# Altium PCB Copy of ESP32.PcbDoc
Units mm, origin at the board's own origin, x right, y up, seen from the top; angles counter-clockwise.
Board outline 68.47 x 29.07 mm, 2 copper layers (Top Layer, Bottom Layer); 62 components, 74 nets, 294 pads, 12 vias.
Unrouted connection lines stored in the file: 75.
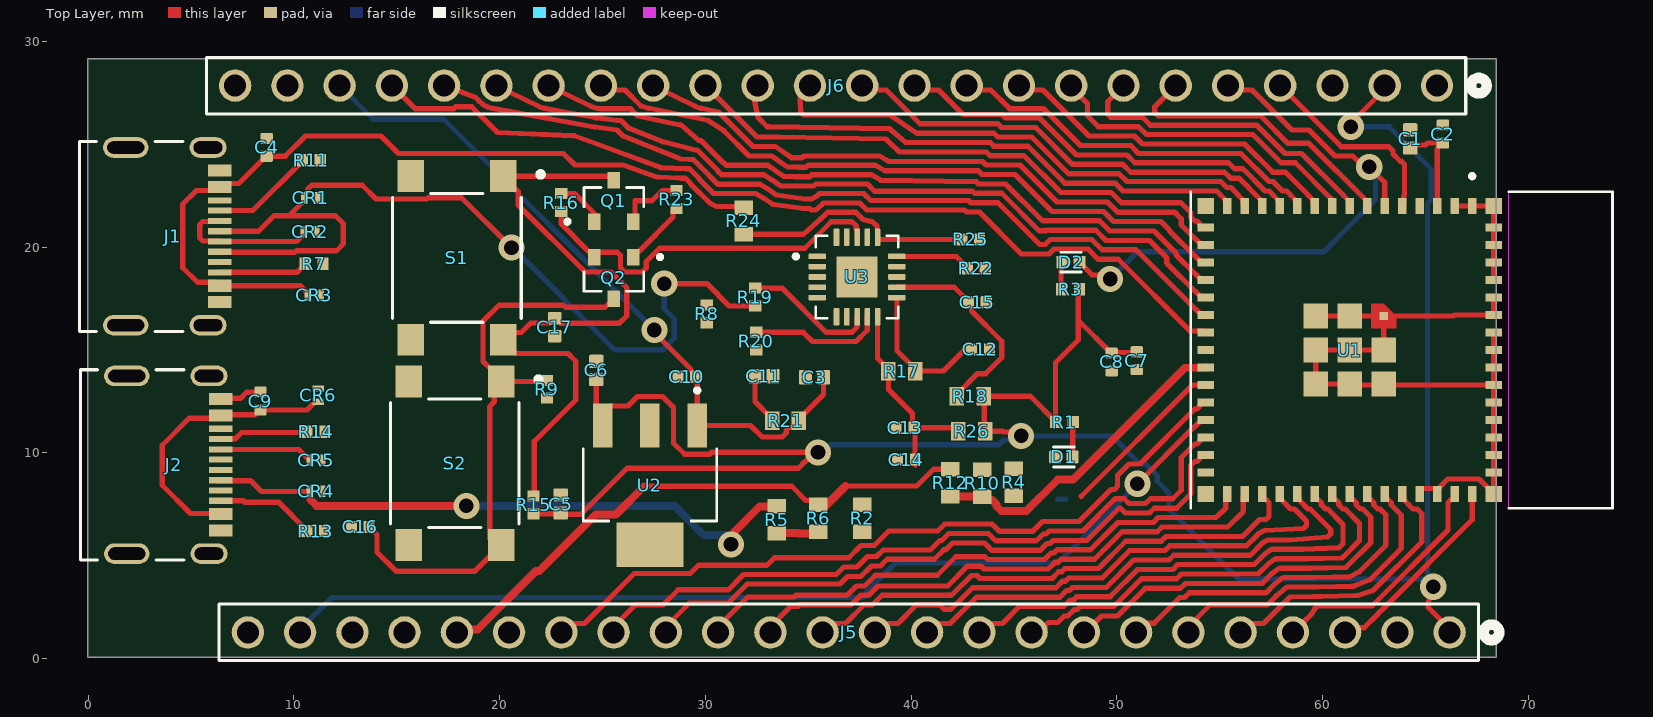
[diagram p0: Top Layer view]
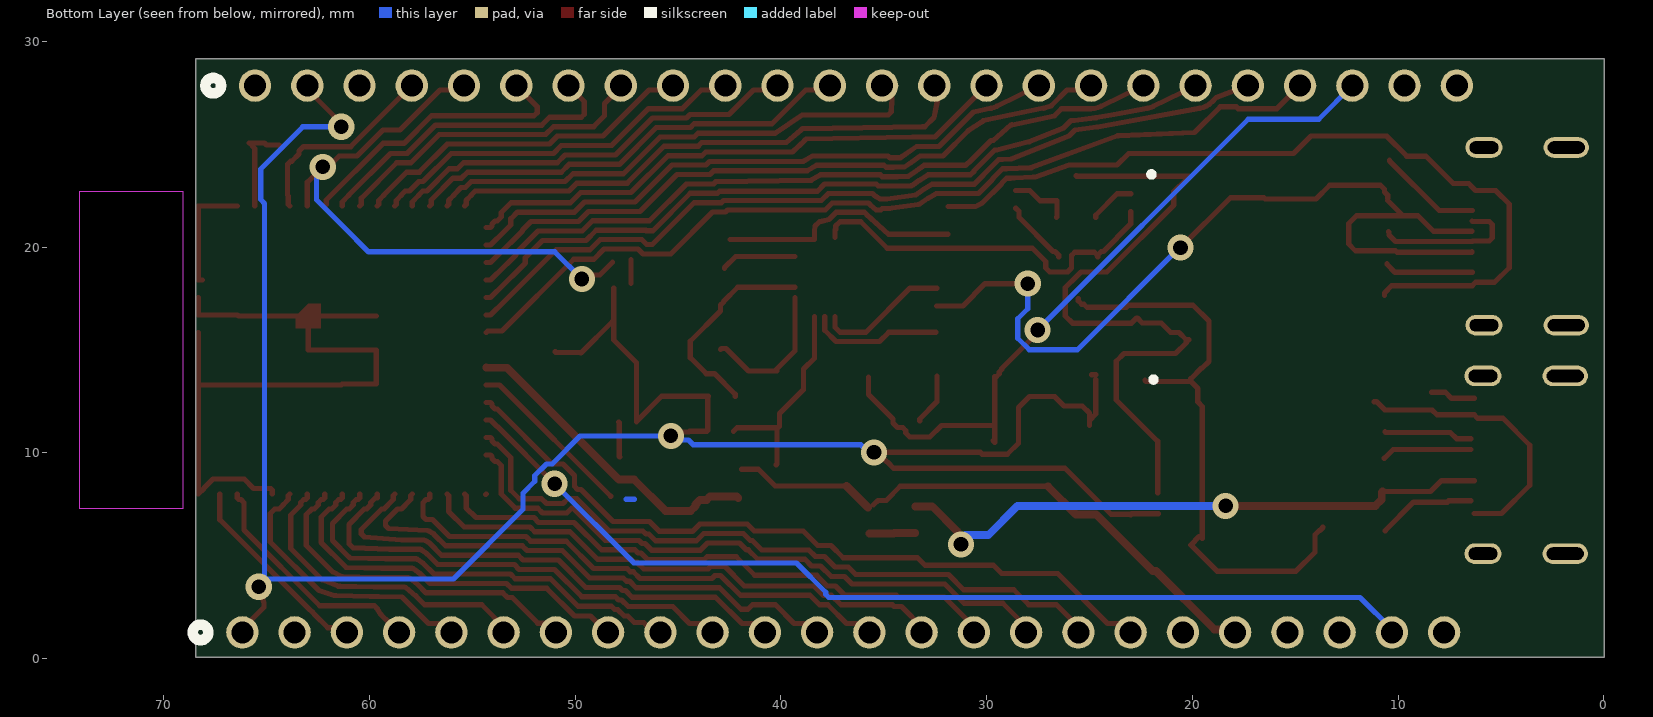
[diagram p1: Bottom Layer view, seen from below]

## Layer stack, top to bottom
Top Solder: solder mask 0.0102, Solder Resist, Dk 3.5
Top Layer: signal copper 0.0356
Dielectric 1: dielectric 0.32, FR-4, Dk 4.8
Bottom Layer: signal copper 0.0356
Bottom Solder: solder mask 0.0102, Solder Resist, Dk 3.5

## Board outline
-0.025,0.077 -0.025,29.152 68.45,29.152 68.45,0.077

## Design rules (kind name [scope] priority, off if disabled: settings)
Clearance [All] p1: gap=0.203 ignorepadtopadclearanceinfootprint=TRUE
DiffPairsRouting [All] p1: maxlimit=0.254 minlimit=0.254 mostfreqgap=0.254 toplayer_minwidth=0.381 toplayer_maxwidth=0.381 toplayer_prefwidth=0.381 bottomlayer_minwidth=0.381 bottomlayer_maxwidth=0.381 bottomlayer_prefwidth=0.381 maxuncoupledlength=12.7
PolygonConnect [All] p1: connectstyle=Relief reliefconductorwidth=0.254 reliefentries=4 polygonreliefangle="90 Angle" airgapwidth=0.254
RoutingVias [All] p1: holewidth=0.711 width=1.27 viastyle="Through Hole" minholewidth=0.711 minwidth=1.27 maxholewidth=0.711 maxwidth=1.27
SolderMaskExpansion [All] p1: expansion=0.102 istentingtop=FALSE
Width Width_2 [All] p1: maxlimit=0.254 minlimit=0.254 preferedwidth=0.254
Width Width_1 [All] p2: maxlimit=0.254 minlimit=0.254 preferedwidth=0.254
29 further rules are at their usual default settings.

## Classes and differential pairs
differential pair class DIFF90: CON2_USB CON_ESP_USB ESP_USB
differential pair ESP_USB: +ESP_USB_P -ESP_USB_N
differential pair CON_ESP_USB: +CON_ESP_USB_P -CON_ESP_USB_N
differential pair CON2_USB: +CON2_USB_P -CON2_USB_N

## Components (designator, comment, footprint, x,y, rotation, side; value= is the part's Value field where it differs from the comment)
C1 "10uF,10V" CAPC1005X90N 64.265,25.264 r90 top
C2 "0.1uF,50V" CAPC1005X55N#1 65.85,25.5 r270 top
C3 "4.7uF" CAPC1005X55N#2 35.3,13.675 r0 top
C4 "0.1uF,50V" CAPC1005X55N#1 8.675,24.85 r270 top
C5 "10uF" CAPC1005X90N 22.975,7.511 r270 top
C6 "10uF" CAPC1005X90N 24.7,14.011 r270 top
C7 "0.1uF,50V" CAPC1005X55N#1 50.975,14.482 r90 top
C8 "0.1uF,50V" CAPC1005X55N#1 49.75,14.418 r90 top
C9 "0.1uF,50V" CAPC1005X55N#1 8.375,12.518 r270 top
C10 "0.1uF,50V" CAPC1005X55N#1 29.1,13.7 r0 top
C11 "4.7uF" CAPC1005X55N#2 32.85,13.725 r180 top
C12 "100nF,50V" CAPC1005X55N#1 43.375,15.025 r180 top
C13 "100nF,50V" CAPC1005X55N#1 39.707,11.225 r0 top
C14 "100nF,50V" CAPC1005X55N#1 39.775,9.675 r0 top
C15 "100nF,50V" CAPC1005X55N#1 43.225,17.325 r180 top
C16 "100nF,50V" CAPC1005X55N#1 13.225,6.4 r0 top
C17 "1uF,35V" CAPC1005X65N 22.675,16.112 r270 top
CR1 "AQ3045-01ETG" RTVS_SOD882_LTF 10.825,22.4 r0 top
CR2 "AQ3045-01ETG" RTVS_SOD882_LTF 10.785,20.75 r0 top
CR3 "AQ3045-01ETG" RTVS_SOD882_LTF 10.983,17.65 r180 top
CR4 "AQ3045-01ETG" RTVS_SOD882_LTF 11.075,8.125 r0 top
CR5 "AQ3045-01ETG" RTVS_SOD882_LTF 11.075,9.65 r0 top
CR6 "AQ3045-01ETG" RTVS_SOD882_LTF 11.175,12.808 r270 top
D1 "GREEN" LEDC1005X35N 47.425,9.8 r180 top
D2 "RED" LEDC1005X35N 47.775,19.275 r0 top
J1 "2171790001" MOLEX_2171790001 2.975,20.525 r270 top
J2 "2171790001" MOLEX_2171790001 3.025,9.42 r270 top
J5 "22284245" CONN_SD-42375-001_M295_24_MOL 66.18,1.275 r0 top
J6 "22284245" CONN_SD-42375-001_M295_24_MOL 65.565,27.85 r0 top
Q1 "SS8050-G" TRANS_SS8050-G 25.55,22.25 r90 top
Q2 "SS8050-G" TRANS_SS8050-G 25.55,18.51 r270 top
R1 "1k" RESC1005X40N#1 47.455,11.5 r0 top
R2 "0R" RESC1005X40 37.625,6.825 r270 top
R3 "1k" RESC1005X40N#1 47.75,17.95 r180 top
R4 "0R" RESC1005X40 45,8.575 r90 top
R5 "0R" RESC1005X40 33.475,6.75 r90 top
R6 "0R" RESC1005X40 35.5,6.825 r90 top
R7 "5.1k" RESC1005X40N#2 10.975,19.2 r180 top
R8 "27ohm" RESC1005X40N#2 30.075,16.757 r270 top
R9 "27ohm" RESC1005X40N#2 22.3,13.093 r270 top
R10 "0R" RESC1005X40 43.45,8.525 r90 top
R11 "5.1k" RESC1005X40N#2 10.85,24.225 r180 top
R12 "0R" RESC1005X40 41.9,8.55 r90 top
R13 "5.1k" RESC1005X40N#2 11.057,6.2 r180 top
R14 "5.1k" RESC1005X40N#2 11.075,11.025 r180 top
R15 "AC0402FR-0710KL" RESC1005X37N 21.65,7.475 r270 top
R16 "AC0402FR-0710KL" RESC1005X37N 23,22.168 r90 top
R17 "0R" RESC1005X40 39.55,13.975 r180 top
R18 "0R" RESC1005X40 42.875,12.75 r0 top
R19 "27R" RESC1005X40N#2 32.425,17.575 r90 top
R20 "27R" RESC1005X40N#2 32.475,15.432 r90 top
R21 "0R" RESC1005X40 33.9,11.55 r0 top
R22 "10k" RESC1005X37N 43.175,18.975 r0 top
R23 "AC0402FR-0710KL" RESC1005X37N 28.6,22.318 r270 top
R24 "4k7" RESC1005X40 31.875,21.275 r90 top
R25 "10k" RESC1005X37N 42.9,20.375 r0 top
R26 "0R" RESC1005X40 42.95,11.05 r0 top
S1 "SWITCH" SWITCH_43SMTR92LFS 17.925,19.475 r270 top
S2 "SWITCH" SWITCH_43SMTR92LFS 17.825,9.5 r270 top
U1 "ESP32-S3-MINI-1-N8" XCVR_ESP32-S3-MINI-1-N8 61.325,15 r270 top
U2 "TL1963A-33DCYR" VREG_TL1963A-33DCYR 27.307,8.437 r270 top
U3 "FT231XQ-R" QFN50P400X400X80-21N 37.375,18.55 r0 top

## Footprints (in the part's own frame and the unit in brackets; to place one, negate y for a bottom-side part, rotate by r counter-clockwise, add the part's x,y. Pads: shape width x height; smd on the part's side, far side on the other; paste and mask are expansions set on the pad)
CAPC1005X55N#1 [mm]
  rrect25% 0.54x0.6 smd: 1(-0.432,0) 2(0.432,0)
  body extent -0.5,-0.25 0.5,0.25, height 0.55
CAPC1005X55N#2 [mm]
  rrect25% 0.64x0.72 smd paste+0 mask+0.102: 1(-0.439,0) 2(0.439,0)
  body extent -0.5,-0.25 0.5,0.25, height 0.55
CAPC1005X65N [mm]
  rrect25% 0.6x0.67 smd: 1(-0.437,0) 2(0.437,0)
  body extent -0.5,-0.25 0.5,0.25, height 0.65
CAPC1005X90N [mm]
  rrect25% 0.64x0.72 smd: 1(-0.439,0) 2(0.439,0)
  body extent -0.5,-0.25 0.5,0.25, height 0.9
CONN_SD-42375-001_M295_24_MOL [mil]
  round 62 hole 42: 1(0,0) 2(-100,0) 3(-200,0) 4(-300,0) 5(-400,0) 6(-500,0) 7(-600,0) 8(-700,0) 9(-800,0) 10(-900,0) 11(-1000,0) 12(-1100,0) 13(-1200,0) 14(-1300,0) 15(-1400,0) 16(-1500,0) 17(-1600,0) 18(-1700,0) 19(-1800,0) 20(-1900,0) 21(-2000,0) 22(-2100,0) 23(-2200,0) 24(-2300,0)
  silkscreen extent -2355,-54 95,54
LEDC1005X35N [mm]
  rrect15% 0.59x0.61 smd: 1(-0.415,0) 2(0.415,0)
  silkscreen extent -0.5,-0.49 0.5,0.49, body extent -1,-1 1,1, height 0.8
MOLEX_2171790001 [mm]
  rect 0.59x1.15 smd mask+0.064: A1B12(-3.2,3.425) A4B9(-2.4,3.425) B1A12(3.2,3.425) B4A9(2.4,3.425)
  rect 0.298x1.15 smd mask+0.064: A5(-1.25,3.425) A6(-0.25,3.425) A7(0.25,3.425) A8(1.25,3.425) B5(1.75,3.425) B6(0.75,3.425) B7(-0.75,3.425) B8(-1.75,3.425)
  oval 1x2.2 hole 0.6 slot 1.8 at 90 deg mask+0.064: SH1(-4.32,-1.15) SH2(4.32,-1.15)
  oval 1x1.8 hole 0.6 slot 1.4 at 90 deg mask+0.064: SH3(-4.32,2.85) SH4(4.32,2.85)
  silkscreen extent -4.62,-3.4 4.62,1.63
QFN50P400X400X80-21N [mm]
  rrect25% 0.84x0.27 smd: 1(-1.935,1) 2(-1.935,0.5) 3(-1.935,0) 4(-1.935,-0.5) 5(-1.935,-1) 11(1.935,-1) 12(1.935,-0.5) 13(1.935,0) 14(1.935,0.5) 15(1.935,1)
  rrect25% 0.27x0.84 smd: 6(-1,-1.935) 7(-0.5,-1.935) 8(0,-1.935) 9(0.5,-1.935) 10(1,-1.935) 16(1,1.935) 17(0.5,1.935) 18(0,1.935) 19(-0.5,1.935) 20(-1,1.935)
  rect 2x2 smd paste-0.37: 21(0,0)
  silkscreen extent -3.07,-2 2,2
RESC1005X37N [mm]
  rect 0.54x0.6 smd: 1(-0.432,0) 2(0.432,0)
  body extent -0.5,-0.25 0.5,0.25, height 0.37
RESC1005X40 [mm]
  rect 0.7x0.9 smd: 1(-0.65,0) 2(0.65,0)
  body extent -0.5,-0.25 0.5,0.25, height 0.4
RESC1005X40N#1 [mm]
  rect 0.54x0.6 smd: 1(-0.43,0) 2(0.43,0)
  body extent -0.5,-0.25 0.5,0.25, height 0.4
RESC1005X40N#2 [mm]
  rect 0.54x0.6 smd: 1(-0.432,0) 2(0.432,0)
  body extent -0.5,-0.25 0.5,0.25, height 0.4
RTVS_SOD882_LTF [mil]
  rect 12x22 smd paste+0 mask+0: 1(-12.5,0) 2(12.5,0)
  body extent -21,-13 21,13, height 22
SWITCH_43SMTR92LFS [mm]
  rect 1.549x1.295 smd: 1(-3.975,2.25) 2(3.975,2.25) 3(-3.975,-2.25) 4(3.975,-2.25)
  silkscreen extent -4.19,-3.12 3.12,4.19, body extent -4.5,-3 4.5,3, height 4.3
TRANS_SS8050-G [mm]
  rect 0.8x0.6 smd: 1(-1.01,0.95) 2(-1.01,-0.95) 3(1.01,0)
  silkscreen extent -1.11,-1.45 0.65,2.35
VREG_TL1963A-33DCYR [mm]
  rect 2.15x0.95 smd: 1(-2.9,2.3) 2(-2.9,0) 3(-2.9,-2.3)
  rect 2.15x3.25 smd: 4(2.9,0)
  silkscreen extent -4.7,-3.25 1.75,3.25, body extent -3.5,-3.25 3.5,3.25, height 1.8
XCVR_ESP32-S3-MINI-1-N8 [mm]
  rect 0.8x0.4 smd: 1(-7,5.95) 2(-7,5.1) 3(-7,4.25) 4(-7,3.4) 5(-7,2.55) 6(-7,1.7) 7(-7,0.85) 8(-7,0) 9(-7,-0.85) 10(-7,-1.7) 11(-7,-2.55) 12(-7,-3.4) 13(-7,-4.25) 14(-7,-5.1) 15(-7,-5.95) 31(7,-5.95) 32(7,-5.1) 33(7,-4.25) 34(7,-3.4) 35(7,-2.55) 36(7,-1.7) 37(7,-0.85) 38(7,0) 39(7,0.85) 40(7,1.7) 41(7,2.55) 42(7,3.4) 43(7,4.25) 44(7,5.1) 45(7,5.95)
  rect 0.4x0.8 smd: 16(-5.95,-7) 17(-5.1,-7) 18(-4.25,-7) 19(-3.4,-7) 20(-2.55,-7) 21(-1.7,-7) 22(-0.85,-7) 23(0,-7) 24(0.85,-7) 25(1.7,-7) 26(2.55,-7) 27(3.4,-7) 28(4.25,-7) 29(5.1,-7) 30(5.95,-7) 46(5.95,7) 47(5.1,7) 48(4.25,7) 49(3.4,7) 50(2.55,7) 51(1.7,7) 52(0.85,7) 53(0,7) 54(-0.85,7) 55(-1.7,7) 56(-2.55,7) 57(-3.4,7) 58(-4.25,7) 59(-5.1,7) 60(-5.95,7)
  rect 1.2x1.2 smd: 61(0,0) 61_2(0,1.65) 61_3(1.65,1.65) 61_4(1.65,0) 61_5(1.65,-1.65) 61_6(0,-1.65) 61_7(-1.65,-1.65) 61_8(-1.65,0)
  rect 0.4x0.4 smd paste-1 mask+0: 61_1(-1.65,1.65)
  rect 0.8x0.8 smd: 62(-7,7) 63(-7,-7) 64(7,-7) 65(7,7)
  Top Layer region: -1.05,1.05 -2.25,1.05 -2.25,1.65 -1.65,2.25 -1.05,2.25
  Keep-Out Layer region: 7.7,7.725 -7.7,7.725 -7.7,12.775 7.7,12.775
  Keep-Out Layer region: 7.7,7.725 -7.7,7.725 -7.7,12.775 7.7,12.775
  silkscreen extent -8.55,-7.73 7.7,12.78, body extent -7.7,-7.84 7.7,12.66, height 2.55

## Part data
C1 C5 C6: library part CL05A106MP8NUB8, "10 ÂµF Â±20% 10V Ceramic Capacitor X5R 0402 (1005 Metric)", Package="SMD-2 Samsung", Check_prices=https://www.snapeda.com/parts/CL05A106MP8NUB8/Samsung/view-part/?ref=eda, MF="Samsung Electro-Mechanics", MP=CL05A106MP8NUB8, SnapEDA_Link=https://www.snapeda.com/parts/CL05A106MP8NUB8/Samsung/view-part/?ref=snap
C2 C4 C7 C8 C9 C10 C12 C13 C14 C15 C16: library part CL05B104KB5NNNC, "0.1 ÂµF Â±10% 50V Ceramic Capacitor X7R 0402 (1005 Metric)", Package="SMD-2 Samsung", Check_prices=https://www.snapeda.com/parts/CL05B104KB5NNNC/Samsung/view-part/?ref=eda, MF="Samsung Electro-Mechanics", MP=CL05B104KB5NNNC, SnapEDA_Link=https://www.snapeda.com/parts/CL05B104KB5NNNC/Samsung/view-part/?ref=snap
C3 C11: library part CL05A475MO5LUNC, "4.7 ÂµF Â±20% 16V Ceramic Capacitor X5R 0402 (1005 Metric)", Package="SMD-2 Samsung", Check_prices=https://www.snapeda.com/parts/CL05A475MO5LUNC/Samsung/view-part/?ref=eda, MF="Samsung Electro-Mechanics", MP=CL05A475MO5LUNC, SnapEDA_Link=https://www.snapeda.com/parts/CL05A475MO5LUNC/Samsung/view-part/?ref=snap
C17: library part CL05A105KL5NRNC, "1 ÂµF Â±10% 35V Ceramic Capacitor X5R 0402 (1005 Metric)", Package="SMD-2 Samsung", Check_prices=https://www.snapeda.com/parts/CL05A105KL5NRNC/Samsung/view-part/?ref=eda, MF=Samsung, MP=CL05A105KL5NRNC, SnapEDA_Link=https://www.snapeda.com/parts/CL05A105KL5NRNC/Samsung/view-part/?ref=snap
CR1 CR2 CR3 CR4 CR5 CR6: "Description", Manufacturer_Name="Littelfuse Inc", Copyright="Copyright (C) 2025 Ultra Librarian. All rights reserved.", Manufacturer_Part_Number=AQ3045-01ETG, RefDes=RefDes, Type=Type
D1 D2: library part VLMG1500-GS08, "Yellow-Green 571nm LED Indication - Discrete 2V 0402 (1005 Metric)", Package=Connector, Check_prices=https://www.snapeda.com/parts/VLMG1500-GS08/Vishay+Semiconductor+Opto+Division/view-part/?ref=eda, MF=Vishay, MP=VLMG1500-GS08, SnapEDA_Link=https://www.snapeda.com/parts/VLMG1500-GS08/Vishay+Semiconductor+Opto+Division/view-part/?ref=snap
J1 J2: "USB Type C - Connector, Top-mount SMT, 16pos", Package=None, Check_prices=https://www.snapeda.com/parts/217179-0001/Molex/view-part/?ref=eda, MF=Molex, MP=217179-0001, SnapEDA_Link=https://www.snapeda.com/parts/217179-0001/Molex/view-part/?ref=snap
J5 J6: "Connector Header Through Hole 24 position 0.100 (2.54mm)", Package=None, Check_prices=https://www.snapeda.com/parts/22-28-4245/Molex/view-part/?ref=eda, MF=Molex, MP=22-28-4245, SnapEDA_Link=https://www.snapeda.com/parts/22-28-4245/Molex/view-part/?ref=snap
Q1 Q2: "Bipolar (BJT) Transistor NPN 25 V 1.5 A 100MHz 300 mW Surface Mount SOT-23-3", Package=None, Check_prices=https://www.snapeda.com/parts/SS8050G/Comchip/view-part/?ref=eda, Digi-Key_Part_Number=641-1790-2-ND, MF=Comchip, MP=SS8050G, SnapEDA_Link=https://www.snapeda.com/parts/SS8050G/Comchip/view-part/?ref=snap
R1 R3: library part RC0402FR-071KL, "1 kOhms Â±1% 0.063W, 1/16W Chip Resistor 0402 (1005 Metric) Moisture Resistant Thick Film", Package="0402-2 YAGEO", Check_prices=https://www.snapeda.com/parts/RC0402FR071KL/Yageo/view-part/?ref=eda, MF="Yageo Corporation", MP=RC0402FR071KL, SnapEDA_Link=https://www.snapeda.com/parts/RC0402FR071KL/Yageo/view-part/?ref=snap
R2 R4 R5 R6 R10 R12 R17 R18 R21 R26: library part RC0402JR-070RL, "0 Ohms Jumper 0.063W, 1/16W Chip Resistor 0402 (1005 Metric) Moisture Resistant Thick Film", Package="0402 Yageo", Check_prices=https://www.snapeda.com/parts/RC0402JR-070RL/Yageo/view-part/?ref=eda, Digi-Key_Part_Number=311-0.0JRTR-ND, MF=Yageo, MP=RC0402JR-070RL, Purchase-URL=https://pricing.snapeda.com/search/part/RC0402JR-070RL/?ref=eda, SnapEDA_Link=https://www.snapeda.com/parts/RC0402JR-070RL/Yageo/view-part/?ref=snap
R7 R8 R9 R11 R13 R14 R19 R20: library part RC0402FR-0727RL, "27 Ohms Â±1% 0.063W, 1/16W Chip Resistor 0402 (1005 Metric) Moisture Resistant Thick Film", Package="1005 Panasonic Electronic Components", Check_prices=https://www.snapeda.com/parts/RC0402FR-0727RL/Yageo/view-part/?ref=eda, MF=Yageo, MP=RC0402FR-0727RL, SnapEDA_Link=https://www.snapeda.com/parts/RC0402FR-0727RL/Yageo/view-part/?ref=snap
R15 R16 R23: "10 kOhms Â±1% 0.063W, 1/16W Chip Resistor 0402 (1005 Metric) Automotive AEC-Q200, Moisture Resistant Thick Film", Package="1005 Yageo", Check_prices=https://www.snapeda.com/parts/AC0402FR-0710KL/Yageo/view-part/?ref=eda, Digi-Key_Part_Number=YAG3436TR-ND, MF=Yageo, MP=AC0402FR-0710KL, Purchase-URL=https://pricing.snapeda.com/search/part/AC0402FR-0710KL/?ref=eda, SnapEDA_Link=https://www.snapeda.com/parts/AC0402FR-0710KL/Yageo/view-part/?ref=snap
R22 R25: library part AC0402FR-0710KL, "10 kOhms Â±1% 0.063W, 1/16W Chip Resistor 0402 (1005 Metric) Automotive AEC-Q200, Moisture Resistant Thick Film", Package="1005 Yageo", Check_prices=https://www.snapeda.com/parts/AC0402FR-0710KL/Yageo/view-part/?ref=eda, Digi-Key_Part_Number=YAG3436TR-ND, MF=Yageo, MP=AC0402FR-0710KL, Purchase-URL=https://pricing.snapeda.com/search/part/AC0402FR-0710KL/?ref=eda, SnapEDA_Link=https://www.snapeda.com/parts/AC0402FR-0710KL/Yageo/view-part/?ref=snap
R24: library part RC0402FR-074K7L, "4.7 kOhms Â±1% 0.063W, 1/16W Chip Resistor 0402 (1005 Metric) Moisture Resistant Thick Film", Package="1005 Panasonic Electronic Components", Check_prices=https://www.snapeda.com/parts/RC0402FR-074K7L/Yageo/view-part/?ref=eda, MF=Yageo, MP=RC0402FR-074K7L, SnapEDA_Link=https://www.snapeda.com/parts/RC0402FR-074K7L/Yageo/view-part/?ref=snap
S1 S2: library part PTS645SK50SMTR92LFS, "Switch;Tactile;SPST-NO;OFF-MOM;Top Actuator;260 Grams;4.3mm;.05A;12VDC;Gull Wing", Package=None, Check_prices=https://www.snapeda.com/parts/PTS645SK50SMTR92%20LFS/C%2526K/view-part/?ref=eda, MF=C&K, MP="PTS645SK50SMTR92 LFS", SnapEDA_Link=https://www.snapeda.com/parts/PTS645SK50SMTR92%20LFS/C%2526K/view-part/?ref=snap
U1: Package=None, Availability=Unavailable, MF="{'manufacturer': u'Espressif Systems'}", MP=ESP32-S3-MINI-1-N8, Price=None
U2: "1.5-A, 20-V, low-dropout voltage regulator with reverse current & reverse voltage protection", Package="SOT-223-4 Texas Instruments", Check_prices=https://www.snapeda.com/parts/TL1963A-33DCYR/Texas+Instruments/view-part/?ref=eda, MF="Texas Instruments", MP=TL1963A-33DCYR, SnapEDA_Link=https://www.snapeda.com/parts/TL1963A-33DCYR/Texas+Instruments/view-part/?ref=snap
U3: "USB2.0 Full Speed IC offers a compact bridge to full handshake UART Interface", Package=None, Availability=Unavailable, MP=FT231XQ-R, Price=None

## Via types
v1: diameter 1.27, hole 0.711, Top Layer to Bottom Layer, 12 vias

## Nets (pads, with @x,y where several pads share a name; then routed paths per layer and width w, separated by ;. In a path a pad name is that pad's centre, name@x,y a point inside that pad or via, vN(x,y) a via of type N, cw(c..) or ccw(c..) an arc to the next point about the centre after c; other vN are vias at no path point)
+3V3: C5.2 C6.2 C7.2 C8.2 J5.1 J6.2 R1.1 R3.1 R15.2 R18.2 R26.2 U2.3 | length 112.7
  Top Layer w0.254: R15.2 22.943,7.043 23,6.986 23.028,7.014 23.953,7.014 26.189,9.25 34.525,9.25 34.825,9.55 34.837,9.55 v1@35.312,10.025 ; C6.2 24.7,11.883 U2.3@25.007,11.576 ; C6.2@24.7,13.8 C6.2@24.893,13.8 ; U2.3 U2.3@25.007,11.576 ; v1(45.35,10.825) 45.156,11.019 44.481,11.019 44.45,11.05 R26.2 43.563,11.087 43.563,12.712 R18.2 45.805,12.75 R1.1@47.025,11.53 ; R1.1 R1.1@47.025,11.53 ; 48.114,15.471 47.025,14.382 R1.1@47.025,11.53 ; 48.132,15.489 48.132,16.395 R3.1@48.132,18.007 ; 48.157,16.395 48.175,16.395 49.72,14.85 C8.2 49.782,14.882 50.943,14.882 C7.2 ; v1(61.375,25.85) 61.375,26.025 63.025,27.675 J6.2 ; v1(65.382,3.492) 65.132,2.708 65.132,2.498 65.281,2.349 J5.1@66.13,1.5 ; U2.3@25.007,11.576 25.007,11.937 25.355,12.285 26.238,12.285 26.695,12.742 27.919,12.742 28.457,12.203 28.457,10.47 28.995,9.931 30.219,9.931 30.312,10.025 v1@35.312,10.025 ; v1@35.312,10.025 v1(35.475,10.025) v1@35.312,10.025
  Bottom Layer w0.254: v1(35.475,10.025) 35.75,10.025 36.125,10.4 44.269,10.4 44.5,10.631 45.156,10.631 v1(45.35,10.825) 49.76,10.825 51.12,9.465 51.4,9.465 51.965,8.9 51.965,8.62 52.544,8.041 52.544,7.256 55.925,3.875 65,3.875 v1(65.382,3.492) ; v1(61.375,25.85) 63.24,25.85 65.29,23.8 65.29,22.315 65.1,22.125 v1@65.1,3.975
+3V3_FTDI: C13.2 C14.2 R17.2 R26.1 U3.10 U3.20 | length 10.2
  Top Layer w0.254: U3.10 38.375,14.6 38.9,14.075 R17.2 38.9,13.073 40.067,11.906 40.067,11.297 C13.2 ; C14.2@40.232,9.425 40.186,9.471 40.186,11.178 C13.2 ; R26.1 42.125,11.225 C13.2
+5V: C3.2 C10.2 J6.22 R21.2 U2.1 | length 34.8
  Top Layer w0.254: v1(27.525,15.975) 27.525,15.84 29.268,14.097 29.268,14.057 29.389,13.936 29.389,13.843 C10.2 ; U2.1@29.607,10.507 U2.1@29.698,10.598 ; U2.1@29.607,10.598 U2.1 ; C10.2@29.607,13.718 29.607,12.075 U2.1 ; C3.2 35.739,12.839 34.55,11.65 34.55,11.45 34.327,11.227 34.079,11.227 33.93,11.078 33.93,10.963 33.737,10.77 32.763,10.77 32.197,11.337 U2.1
  Bottom Layer w0.254: J6.22 13.859,26.216 17.284,26.216 v1(27.525,15.975)
+5V_VBUS1: C4.2 CR3.2 J1.A4B9 J1.B4A9 R24.2 | length 39.7
  Top Layer w0.254: CR3.2 10.665,17.777 10.317,18.125 J1.B4A9 6.232,18.293 5.307,18.293 4.6,19 4.6,22.1 5.257,22.757 6.232,22.757 J1.A4B9 6.568,23.093 7.32,23.093 8.645,24.418 C4.2 9.574,24.418 10.556,25.4 14.235,25.4 15.08,24.555 23.095,24.555 23.66,23.99 25.987,23.99 27.637,23.416 27.753,23.407 28.656,23.363 28.853,23.351 28.861,23.35 29.037,23.35 29.23,23.157 29.285,23.075 30.212,22.148 30.561,21.97 R24.2@31.875,21.97
+5V_VBUS2: C9.2 CR6.2 J2.A4B9 J2.B4A9 | length 13.7
  Top Layer w0.254: J2.B4A9@6.3,7.05 4.975,7.05 3.597,8.428 3.597,10.372 4.907,11.682 6.132,11.682 6.3,11.85 8.109,11.85 8.345,12.086 C9.2 10.644,12.086 11.048,12.49 CR6.2
BTN_GPIO0: C16.2 Q2.3 R9.1 S2.1 S2.2 | length 29.4
  Top Layer w0.254: C16.2 13.657,6.37 13.8,6.227 13.83,6.227 14.04,6.017 14.04,5.171 14.961,4.25 18.8,4.25 S2.2 19.671,5.929 S2.2@19.522,5.929 ; S2.2@19.522,5.854 19.522,12.256 19.734,12.468 19.734,13.134 S2.1 ; R9.1 22.25,13.475 S2.1 ; Q2.3 25.55,17.4 25.377,17.227 25.277,17.227 25.127,17.077 23.205,17.077 23.103,17.179 19.965,17.179 19.197,16.411 19.197,14.444 19.518,14.123 19.554,14.123 20.075,13.602 S2.1
CHIP_PU: C17.1 J5.3 Q1.3 R15.1 S1.1 S1.2 U1.45 | length 42.8
  Top Layer w0.254: S1.2 20.3,15.5 20.655,15.855 21.055,15.855 21.514,16.314 22.44,16.314 C17.1 22.71,16.549 22.954,16.305 25.83,16.305 26.18,16.655 26.18,18.037 25.884,18.333 25.874,18.333 25.417,18.79 24.163,18.79 20.9,22.053 20.9,22.698 S1.1@20.3,23.298 ; S1.1 25.63,23.45 Q1.3@25.65,23.47 ; S1.2@20.3,15.475 20.3,15.348 20.821,14.827 23.323,14.827 23.7,14.45 23.7,12.575 21.686,10.561 R15.1@21.686,8.057 ; J5.3@61.05,1.5 62.025,1.5 62.697,2.172 cw(c63.59,1.5) 62.918,2.393 67.275,6.75 U1.45
CON1_USB_N: CR2.1 J1.A7 J1.B7 R20.1 | length 7.1
  Top Layer w0.25: J1.A7 6.377,20.298 5.571,20.298 5.425,20.444 5.425,21.106 5.571,21.252 6.377,21.252 J1.B7 ; 9.815,20.275 9.822,20.281 10.126,20.281 10.441,20.596 10.441,20.723 CR2.1
  Top Layer w0.254: J1.A7 9.815,20.275
CON1_USB_P: CR1.1 J1.A6 J1.B6 R19.1 | length 44.4
  Top Layer w0.25: J1.B6 6.423,19.752 10.061,19.752 10.137,19.828 12.078,19.828 12.4,20.15 12.4,21.15 12.025,21.525 9.759,21.525 ; J1.A6 8.281,20.775 9.031,21.525 9.759,21.525 ; CR1.1@10.507,22.273 10.439,22.205 9.759,21.525
  Top Layer w0.254: CR1.1 10.507,22.527 10.66,22.679 10.66,22.816 10.853,23.01 13.324,23.01 13.989,22.345 16.459,22.345 16.514,22.4 18.15,22.4 v1(20.575,19.975) ; v1(28,18.225) 30.076,18.225 31.158,17.143 R19.1
  Bottom Layer w0.254: v1(20.575,19.975) 20.625,19.975 25.59,15.01 27.925,15.01 28.49,15.575 28.49,16.518 28,17.008 v1(28,18.225)
CON2_USB_N: CR5.1 J2.A7 J2.B7 R10.2 | length 4.4
  Top Layer w0.254: J2.B7 7.577,10.17 10.238,10.17 CR5.1@10.669,9.739
CON2_USB_P: CR4.1 J2.A6 J2.B6 R5.2 | length 29.8
  Top Layer w0.254: J2.B6@6.3,8.649 7.896,8.649 8.421,8.125 CR4.1
  Top Layer w0.381: CR4.1 10.796,8.087 10.796,7.733 11.104,7.425 v1(18.385,7.425) ; v1(31.25,5.55) 31.42,5.72 31.42,6.17 32.65,7.4 R5.2
  Bottom Layer w0.381: v1(18.385,7.425) 28.5,7.425 29.925,6 31.027,6 31.25,5.777 v1(31.25,5.55)
CON_ESP_USB_N: J5.20 R6.2 | length 27.8
  Top Layer w0.254: 27.025,8.375 34.2,8.375 34.885,7.69 35.285,7.69 R6.2 ; 36.811,8.386 40.28,8.386 41.094,9.2 41.9,9.2
  Top Layer w0.381: J5.20@17.932,1.263 18.089,1.42 18.935,1.42 21.769,4.254 21.929,4.254 24.68,7.005 25.655,7.005 27.025,8.375 ; R6.2@35.768,7.343 36.811,8.386
CON_ESP_USB_P: J5.21 R12.2
CON_GPIO0: J6.3 R8.1
DTR_FTDI: Q2.2 R16.1 U3.18 | length 18.3
  Top Layer w0.254: R16.1 23,21.12 24.327,19.793 24.427,19.793 24.6,19.62 Q2.2@24.6,19.577 ; Q2.2 Q2.2@24.6,19.577 ; U3.18 37.367,20.493 37.367,20.849 37.34,20.875 37.34,21.022 37.127,21.235 36.123,21.235 34.833,19.945 27.778,19.945 27.13,19.297 27.13,18.983 26.937,18.79 26.063,18.79 25.87,18.983 25.87,19.601 25.721,19.75 24.773,19.75 Q2.2@24.6,19.577
ESP_USB_N: R5.1 R6.1 U1.23 | length 2.2
  Top Layer w0.381: R5.1 34.489,6.1 34.514,6.075 R6.1@35.7,6.075
ESP_USB_P: R10.1 R12.1 U1.24 | length 15.5
  Top Layer w0.381: R12.1@42.075,7.8 42.15,7.875 R10.1 43.61,7.715 43.933,7.715 44.156,7.492 44.156,7.412 44.387,7.181 45.613,7.181 47.132,8.7 47.875,8.7 53.316,14.141 54.315,14.141 U1.24
FTDI_USB_N: R20.2 U3.9 | length 6.5
  Top Layer w0.254: R20.2 34.754,15.864 35.21,15.408 37.316,15.408 37.867,15.958 37.867,16.607 U3.9
FTDI_USB_P: R19.2 U3.8 | length 6.4
  Top Layer w0.254: R19.2 33.72,18.007 35.862,15.865 37.127,15.865 37.367,16.105 37.367,16.607 U3.8
GND: C1.2 C2.1 C3.1 C4.1 C5.1 C6.1 C7.1 C8.1 C9.1 C10.1 C11.1 C12.1 C13.1 C14.1 C15.1 C16.1 C17.2 CR1.2 CR2.2 CR3.1 CR4.2 CR5.2 CR6.1 D1.2 J1.A1B12 J1.B1A12 J1.SH1 J1.SH2 J1.SH3 J1.SH4 J2.A1B12 J2.B1A12 J2.SH1 J2.SH2 J2.SH3 J2.SH4 J5.2 J5.24 J6.1 J6.23 R7.1 R11.1 R13.1 R14.1 R22.2 R25.2 S1.3 S1.4 S2.3 S2.4 U2.2 U2.4 U3.3 U3.13 U3.21 | length 2.2
  Top Layer w0.254: J2.A1B12@6.3,12.65 7.397,12.65 7.694,12.948 8.373,12.948 C9.1
GPIO0: R8.2 R9.2 U1.4
GPIO1: J6.4 U1.5 | length 9.8
  Top Layer w0.254: J6.4 60.91,24.885 61.207,24.885 63.215,24.885 63.433,24.667 63.433,24.525 63.783,24.175 63.841,24.175 63.99,24.026 63.99,22.529 63.948,22.487 63.948,22.073 U1.5
GPIO2: D2.2 J6.5 U1.6 | length 28.8
  Top Layer w0.254: D2.2 48.19,19.265 48.811,18.644 49.481,18.644 v1(49.675,18.45) ; J6.5 55.614,27.641 56.573,27.641 58.514,25.7 59.339,25.7 60.611,24.428 61.472,24.428 62,23.9 v1(62.275,23.9) 63.025,23.15 U1.6
  Bottom Layer w0.254: v1(49.675,18.45) 50.997,19.772 60.047,19.772 61.299,21.024 ; 61.299,21.025 62.575,22.301 62.575,23.325 62.275,23.625 v1(62.275,23.9)
GPIO3: J6.6 U1.7 | length 14.1
  Top Layer w0.254: J6.6 51.85,26.835 51.85,26.537 51.999,26.388 56.987,26.388 58.328,25.047 59.345,25.047 62.102,22.29 62.102,22.073 U1.7
GPIO4: J6.7 U1.8 | length 15.4
  Top Layer w0.254: J6.7 49.558,27.083 49.558,26.46 49.707,26.311 51.247,26.311 51.628,25.931 56.798,25.931 58.169,24.559 58.983,24.559 61.005,22.537 61.005,22.52 61.325,22.2 U1.8
GPIO5: J6.8 U1.9 | length 15.7
  Top Layer w0.254: J6.8 47.785,27.77 48.571,26.984 48.571,26.387 49.105,25.854 51.058,25.854 51.438,25.473 56.608,25.473 57.98,24.102 58.673,24.102 60.402,22.373 60.402,22.073 U1.9
GPIO6: J6.9 U1.10 | length 16.9
  Top Layer w0.254: J6.9 45.454,27.641 46.413,27.641 48.658,25.397 50.868,25.397 51.249,25.016 56.216,25.016 57.587,23.645 58.197,23.645 59.305,22.537 59.305,22.52 59.552,22.273 59.552,22.073 U1.10
GPIO7: J6.10 U1.11 | length 18.6
  Top Layer w0.254: J6.10 42.914,27.641 43.873,27.641 44.782,26.732 46.437,26.732 48.23,24.939 50.679,24.939 51.059,24.559 56.026,24.559 57.398,23.187 57.601,23.187 58.058,22.73 58.262,22.73 58.455,22.537 58.455,22.52 58.702,22.273 58.702,22.073 U1.11
GPIO8: J6.11 U1.12 | length 20.3
  Top Layer w0.254: J6.11 40.374,27.641 41.333,27.641 42.522,26.452 44.416,26.452 44.593,26.275 46.247,26.275 48.04,24.482 50.49,24.482 50.87,24.102 55.43,24.102 55.721,23.811 56.128,23.811 57.208,22.73 57.412,22.73 57.605,22.537 57.605,22.52 57.925,22.2 U1.12
GPIO9: J6.12 U1.13 | length 22
  Top Layer w0.254: J6.12 37.834,27.641 38.793,27.641 40.44,25.995 44.226,25.995 44.403,25.818 46.058,25.818 47.851,24.025 50.3,24.025 50.681,23.645 55.241,23.645 55.532,23.353 55.939,23.353 57.002,22.29 57.002,22.073 U1.13
GPIO10: J6.13 U1.14 | length 25
  Top Layer w0.254: J6.13 34.601,27.3 34.601,27.196 34.641,26.567 34.783,26.425 38.961,26.425 39.026,26.381 40.241,25.56 40.298,25.538 44.037,25.538 44.111,25.463 44.214,25.361 45.868,25.361 47.661,23.568 50.111,23.568 50.491,23.187 55.051,23.187 55.342,22.896 55.546,22.896 55.905,22.537 55.905,22.52 56.152,22.273 56.152,22.073 U1.14
GPIO11: J6.14 U1.15 | length 26.3
  Top Layer w0.254: J6.14 32.332,27.524 32.332,27.422 32.565,26.301 33.011,25.855 33.114,25.853 38.953,25.758 39.023,25.697 39.734,25.081 43.848,25.081 44.025,24.904 45.679,24.904 47.472,23.111 49.921,23.111 50.302,22.73 54.862,22.73 55.055,22.537 55.055,22.52 55.302,22.273 55.302,22.073 U1.15
GPIO12: J6.15 U1.16 | length 27.3
  Top Layer w0.254: J6.15 32.432,25.423 32.507,25.348 33.598,25.348 38.771,25.263 38.843,25.193 39.432,24.623 43.658,24.623 43.835,24.446 45.49,24.446 47.283,22.653 49.732,22.653 50.227,22.158 53.117,22.158 53.595,21.68 53.595,21.463 53.788,21.27 53.903,21.27 54.052,21.121 54.052,21.023 54.125,20.95 U1.16
GPIO13: J6.16 U1.17 | length 30
  Top Layer w0.254: J6.16 29.513,26.846 ccw(c30.005,27.85) 29.772,26.757 30.636,26.573 30.71,26.498 32.317,24.891 33.409,24.891 34.125,24.392 34.189,24.348 34.595,24.341 34.703,24.341 34.797,24.436 38.453,24.436 ; 38.454,24.435 38.781,24.242 ; 38.782,24.241 38.926,24.166 43.469,24.166 43.543,24.092 43.646,23.989 45.3,23.989 47.093,22.196 49.543,22.196 50.038,21.701 52.812,21.701 53.138,21.376 53.138,21.07 53.788,20.42 53.805,20.42 54.125,20.1 U1.17
GPIO14: J6.17 U1.18 | length 32.7
  Top Layer w0.254: J6.17 25.134,27.641 26.093,27.641 26.864,26.871 27.118,26.788 ccw(c27.465,27.85) 27.238,26.756 30.161,26.149 30.224,26.099 30.897,25.657 32.128,24.434 33.219,24.434 33.66,24.128 33.996,23.894 34.045,23.891 34.533,23.884 34.892,23.884 34.987,23.978 38.263,23.978 38.72,23.709 43.279,23.709 43.354,23.635 43.456,23.532 45.055,23.532 46.848,21.739 49.353,21.739 49.848,21.244 52.154,21.244 52.569,20.829 52.569,20.789 53.788,19.57 53.805,19.57 54.125,19.25 U1.18
GPIO15: J6.18 U1.19 | length 35.5
  Top Layer w0.254: J6.18 24.435,26.845 ccw(c24.925,27.85) 24.925,26.732 26.355,26.732 26.43,26.658 26.674,26.413 26.708,26.379 28.765,25.946 28.831,25.932 29.677,25.179 29.794,25.179 30.739,24.235 31.028,23.977 33.03,23.977 33.415,23.714 33.794,23.449 33.853,23.436 34.342,23.427 34.41,23.426 35.081,23.426 35.176,23.521 38.074,23.521 38.53,23.252 43.165,23.177 43.239,23.103 43.267,23.075 43.89,23.075 44.598,23.075 46.391,21.282 49.164,21.282 49.659,20.787 51.813,20.787 52.882,19.718 52.882,19.626 53.788,18.72 53.805,18.72 54.125,18.4 U1.19
GPIO16: J6.19 U1.20 | length 38.3
  Top Layer w0.254: J6.19 21.895,26.845 ccw(c22.385,27.85) 22.182,26.751 23.805,26.454 24.673,26.295 24.704,26.291 ccw(c24.925,27.85) 24.715,26.289 25.735,26.152 25.894,26.152 26.257,25.788 27.92,25.126 29.503,24.722 29.605,24.722 30.602,23.725 30.62,23.691 30.631,23.668 30.78,23.52 30.877,23.52 32.841,23.52 33.221,23.274 33.271,23.246 33.566,23.031 33.66,22.982 33.804,22.979 34.221,22.97 34.265,22.969 35.271,22.969 35.365,23.064 37.885,23.064 38.228,22.72 38.334,22.72 42.975,22.72 43.078,22.618 43.701,22.618 44.409,22.618 46.227,20.8 46.551,20.8 46.575,20.825 48.975,20.825 49.47,20.33 51.595,20.33 52.425,19.5 52.425,19.233 53.788,17.87 53.805,17.87 54.125,17.55 U1.20
GPIO17: J6.20 U1.21 | length 41.1
  Top Layer w0.254: J6.20 18.838,27.277 19.053,27.061 ccw(c19.845,27.85) 19.642,26.751 24.6,25.844 24.641,25.838 ccw(c24.925,27.85) 24.652,25.836 25.704,25.695 25.779,25.62 26.001,25.399 28.802,24.283 29.235,24.265 29.416,24.265 30.145,23.536 30.163,23.501 30.174,23.479 30.591,23.062 32.651,23.062 33.095,22.787 33.467,22.53 34.844,22.337 35.162,22.337 35.46,22.512 35.555,22.607 37.695,22.607 38.039,22.263 42.786,22.263 42.86,22.189 42.888,22.16 43.511,22.16 44.22,22.16 46.255,20.125 46.522,20.125 46.765,20.367 48.785,20.367 49.28,19.872 50.936,19.872 51.968,18.84 53.788,17.02 53.805,17.02 54.125,16.7 U1.21
GPIO18: J6.21 U1.22 | length 44.5
  Top Layer w0.254: J6.21 15.883,26.732 17.768,26.732 17.855,26.82 18.648,26.82 19.823,25.644 19.893,25.575 23.593,25.416 23.633,25.414 27.835,23.864 27.874,23.862 29.045,23.808 29.226,23.807 29.687,23.346 29.744,23.262 30.402,22.605 32.462,22.605 32.881,22.362 33.252,22.098 33.324,22.073 34.603,21.902 34.7,21.88 34.74,21.88 34.913,21.88 35.078,21.88 35.152,21.806 35.295,21.806 35.363,21.806 35.649,22.055 35.744,22.15 37.506,22.15 37.85,21.806 42.596,21.806 42.671,21.731 42.699,21.703 43.322,21.703 45.357,19.668 46.712,19.668 46.954,19.91 48.596,19.91 49.091,19.415 50.075,19.415 53.567,15.923 54.252,15.923 U1.22
GPIO21: J5.19 U1.25 | length 8.3
  Top Layer w0.254: 48.274,7.888 53.686,13.3 U1.25
GPIO26: J5.18 U1.26 | length 36.6
  Top Layer w0.254: J5.18@22.95,1.5 23.159,1.709 24.118,1.709 26.541,4.131 29.265,4.131 29.673,4.539 33,4.539 33.364,4.904 36.975,4.904 37.566,5.495 38.212,5.495 38.917,6.2 41.3,6.2 41.639,6.539 43.942,6.539 44.296,6.186 45.911,6.186 46.386,6.661 48.161,6.661 49.725,8.225 49.883,8.225 50.035,8.377 50.035,8.9 50.6,9.465 51.123,9.465 53.788,12.13 53.903,12.13 54.052,12.279 54.052,12.377 54.125,12.45 U1.26
GPIO33: J5.17 U1.28 | length 34.1
  Top Layer w0.254: J5.17@25.49,1.5 26.608,2.618 27.95,2.618 28.682,3.35 31.118,3.35 31.85,4.082 36.361,4.082 36.725,4.446 37.368,4.446 37.886,4.964 38.328,4.964 38.646,5.282 40.936,5.282 41.396,5.743 41.489,5.743 41.829,6.082 43.753,6.082 44.107,5.728 46.1,5.728 46.422,6.05 46.565,6.05 46.718,6.203 48.35,6.203 49.914,7.768 50.367,7.768 50.6,7.535 51.4,7.535 51.633,7.768 52.721,7.768 53.138,8.184 53.138,9.78 53.788,10.43 53.903,10.43 54.052,10.579 54.052,10.677 54.125,10.75 U1.28
GPIO34: J5.16 U1.29 | length 31.1
  Top Layer w0.254: J5.16@28.03,1.5 29.219,2.689 31.103,2.689 32.039,3.625 36.55,3.625 36.914,3.989 37.557,3.989 38.075,4.507 38.517,4.507 38.835,4.825 41.125,4.825 41.586,5.286 41.679,5.286 42.018,5.625 43.564,5.625 43.917,5.271 46.29,5.271 46.611,5.593 46.754,5.593 46.908,5.746 48.539,5.746 50.104,7.311 50.178,7.311 50.411,7.078 51.589,7.078 51.822,7.311 52.91,7.311 53.595,7.995 53.595,9.387 53.788,9.58 53.903,9.58 54.052,9.729 54.052,9.827 54.125,9.9 U1.29
GPIO35: J5.15 U1.31 | length 28
  Top Layer w0.254: J5.15@30.57,1.5 32.063,2.993 34.307,2.993 34.389,3.075 36.891,3.075 37.348,3.532 37.747,3.532 38.265,4.05 41.275,4.05 42.175,4.95 43.592,4.95 43.728,4.814 46.479,4.814 46.801,5.136 46.944,5.136 47.097,5.289 48.729,5.289 50.06,6.62 51.779,6.62 52.012,6.853 54.828,6.853 55.302,7.327 55.302,7.927 U1.31
GPIO36: J5.14 U1.32 | length 26.4
  Top Layer w0.254: J5.14@33.11,1.5 34.146,2.536 34.497,2.536 34.579,2.618 37.08,2.618 37.538,3.075 37.936,3.075 38.394,3.532 41.782,3.532 42.743,4.493 43.403,4.493 43.539,4.357 46.668,4.357 46.99,4.679 47.133,4.679 47.286,4.832 48.918,4.832 50.25,6.163 51.968,6.163 52.201,6.396 55.396,6.396 56.152,7.152 56.152,7.927 U1.32
GPIO37: J5.13 U1.33 | length 25.4
  Top Layer w0.254: J5.13@35.65,1.5 35.859,1.709 36.818,1.709 37.727,2.618 38.125,2.618 38.583,3.075 41.971,3.075 42.932,4.036 43.213,4.036 43.349,3.9 46.858,3.9 47.18,4.221 47.323,4.221 47.476,4.375 49.107,4.375 50.439,5.706 52.157,5.706 52.39,5.939 56.114,5.939 56.933,6.758 57.246,6.758 57.395,6.907 57.395,7.578 57.246,7.727 57.148,7.727 57.075,7.8 U1.33
GPIO38: J5.12 U1.34 | length 25.4
  Top Layer w0.254: J5.12@38.19,1.5 38.399,1.709 39.358,1.709 40.267,2.618 41.382,2.618 41.6,2.4 41.943,2.4 42.985,3.442 47.047,3.442 47.369,3.764 47.512,3.764 47.665,3.917 49.297,3.917 50.628,5.249 52.347,5.249 52.58,5.482 56.303,5.482 56.834,6.012 56.897,6.075 57.106,6.202 57.179,6.224 59.078,6.325 59.141,6.388 59.227,6.474 59.227,6.684 59.153,6.759 58.642,7.27 58.438,7.27 58.245,7.463 58.245,7.48 57.998,7.727 57.998,7.927 U1.34
GPIO39: J5.11 U1.35 | length 24.2
  Top Layer w0.254: J5.11@40.73,1.5 40.939,1.709 41.898,1.709 43.175,2.985 47.237,2.985 47.558,3.307 47.701,3.307 47.854,3.46 49.489,3.46 50.82,4.792 52.536,4.792 52.769,5.025 56.493,5.025 57.086,5.618 57.295,5.745 57.368,5.767 58.447,5.768 60.251,5.914 60.316,5.979 60.4,6.063 60.4,6.273 60.326,6.347 59.403,7.27 59.288,7.27 59.095,7.463 59.095,7.48 58.848,7.727 58.848,7.927 U1.35
GPIO40: J5.10 U1.36 | length 22.5
  Top Layer w0.254: J5.10@43.27,1.5 43.479,1.709 44.438,1.709 45.257,2.528 47.426,2.528 47.748,2.85 47.891,2.85 48.044,3.003 49.678,3.003 51.009,4.334 52.725,4.334 52.958,4.567 56.682,4.567 57.212,5.098 57.485,5.288 57.557,5.31 58.627,5.31 59.032,5.31 60.8,5.384 60.911,5.495 60.926,5.51 61,5.584 61,6.523 60.253,7.27 60.138,7.27 59.945,7.463 59.945,7.578 59.723,7.8 59.625,7.8 U1.36
GPIO41: J5.9 U1.37 | length 20.8
  Top Layer w0.254: J5.9@45.81,1.5 46.063,1.753 46.275,1.541 46.457,1.541 46.669,1.753 47.128,1.753 47.446,2.071 47.615,2.071 47.937,2.393 48.08,2.393 48.233,2.546 49.867,2.546 51.199,3.877 52.915,3.877 53.148,4.11 56.872,4.11 57.399,4.638 57.402,4.64 57.674,4.831 57.747,4.853 58.816,4.853 59.218,4.853 60.951,4.889 60.989,4.927 61.8,5.738 61.8,6.573 61.103,7.27 60.988,7.27 60.795,7.463 60.795,7.578 60.646,7.727 60.548,7.727 60.475,7.8 U1.37
GPIO42: J5.8 U1.38 | length 18.6
  Top Layer w0.254: J5.8@48.35,1.5 48.682,1.5 49.255,2.073 50.041,2.073 51.388,3.42 53.104,3.42 53.337,3.653 57.061,3.653 57.529,4.122 57.863,4.374 57.936,4.395 59.405,4.395 59.408,4.395 61.141,4.432 61.179,4.47 62.35,5.641 62.35,6.873 61.953,7.27 61.838,7.27 61.645,7.463 61.645,7.578 61.496,7.727 61.398,7.727 61.325,7.8 U1.38
GPIO45: J5.5 U1.41 | length 13.3
  Top Layer w0.254: J5.5@55.97,1.5 56.179,1.709 57.138,1.709 58.417,2.988 59.573,3.024 59.973,3.024 59.976,3.024 61.636,3.064 61.722,3.073 62.456,3.306 64.825,5.675 64.825,7.05 64.605,7.27 64.388,7.27 64.195,7.463 64.195,7.48 63.948,7.727 63.948,7.927 U1.41
GPIO46: J5.4 U1.44 | length 11.5
  Top Layer w0.254: J5.4@58.51,1.5 58.737,1.727 59.027,1.727 59.45,2.15 59.614,2.418 59.763,2.567 62.417,2.567 66.105,6.255 66.105,7.578 66.254,7.727 66.352,7.727 66.425,7.8 U1.44
GPIO47: J5.23 U1.27 | length 48.4
  Top Layer w0.254: v1(51,8.5) 53.78,11.28 53.805,11.28 54.125,11.6 U1.27
  Bottom Layer w0.254: J5.23 10.3,1.425 11.85,2.975 37.676,2.975 37.825,3.124 37.825,3.225 39.25,4.65 47.15,4.65 v1(51,8.5)
GPIO48: J5.22 U1.30
NetC1_1: C1.1 C2.2 U1.3 | length 4.9
  Top Layer w0.254: C1.1 64.402,24.962 65.006,24.962 65.113,25.068 C2.2@65.82,25.068 ; U1.3 65.575,24.793 65.677,24.895 65.677,24.925 C2.2@65.82,25.068 ; C2.2 C2.2@65.82,25.068
NetC11_2: C11.2 C15.2 R18.1 R21.1 U3.12 | length 12.7
  Top Layer w0.254: C11.2 32.411,12.489 33.25,11.65 R21.1 ; U3.12 42.098,18.05 42.793,17.355 C15.2 42.936,17.182 42.936,16.893 44.407,15.422 44.407,14.628 43.63,13.85 43.225,13.85 42.225,12.85 R18.1
NetC12_2: C12.2 R17.1 U3.11 | length 7.2
  Top Layer w0.254: U3.11 39.31,14.965 40.2,14.075 R17.1 41.575,13.975 42.679,15.079 42.889,15.079 C12.2
NetD1_1: D1.1 R1.2 | length 1.7
  Top Layer w0.254: D1.1 47.863,9.823 47.863,11.478 R1.2
NetD2_1: D2.1 R3.2 | length 1.1
  Top Layer w0.254: 47.295,18.25 D2.1@47.295,19.385
NetJ1_A5: J1.A5 R11.2 | length 5.1
  Top Layer w0.254: J1.A5 7.998,21.775 10.418,24.195 R11.2
NetJ1_B5: J1.B5 R7.2 | length 4.3
  Top Layer w0.254: J1.B5 10.148,18.775 10.543,19.17 R7.2
NetJ2_A5: J2.A5 R14.2 | length 4.3
  Top Layer w0.254: J2.A5 6.471,10.691 7.162,10.691 7.466,10.995 10.613,10.995 R14.2
NetJ2_B5: J2.B5 R13.2 | length 4.8
  Top Layer w0.254: J2.B5 7.534,7.67 7.599,7.604 9.251,7.604 10.625,6.23 R13.2
NetQ1_1: Q1.1 R16.2 | length 2.2
  Top Layer w0.254: R16.2 23.65,22.6 24.7,21.55 Q1.1@24.7,21.45
NetQ2_1: Q2.1 R23.2 | length 3.3
  Top Layer w0.254: Q2.1 26.5,19.62 26.673,19.793 26.773,19.793 28.433,21.453 28.433,21.743 28.576,21.886 R23.2
NetR22_1: R22.1 U3.15 | length 3.7
  Top Layer w0.254: U3.15 42.198,19.55 42.743,19.005 R22.1
NetU1_1: U1.1 U1.2 U1.42 U1.43 U1.46 U1.47 U1.48 U1.49 U1.50 U1.51 U1.52 U1.53 U1.54 U1.55 U1.56 U1.57 U1.58 U1.59 U1.60 U1.61 U1.61_1 U1.61_2 U1.61_3 U1.61_4 U1.61_5 U1.61_6 U1.61_7 U1.61_8 U1.62 U1.63 U1.64 U1.65 | length 42.7
  Top Layer w0.254: U1.64 U1.64@54.35,7.975 ; U1.61_7 U1.61_8 U1.61_1 ; U1.42 64.725,8.2 64.798,8.273 65.631,8.273 66.088,8.73 67.612,8.73 68.052,8.29 68.052,8.273 U1.65 U1.46 U1.47 U1.48 U1.49 U1.50 U1.51 ; U1.2 U1.1 U1.62 U1.60 U1.59 U1.58 U1.57 U1.57@68.125,18.4 ; U1.54 U1.53 U1.52 U1.51 ; U1.56 U1.55 66.425,16.7 66.375,16.65 U1.61_1 ; U1.61_1 U1.61_2 U1.61 U1.61_6 U1.61_5 U1.61_4 61.375,13.3 U1.51
RTS_FTDI: Q1.2 R23.1 U3.19 | length 3
  Top Layer w0.254: Q1.2@26.6,21.45 26.575,21.475 26.575,22.255 27.412,22.255 27.907,22.75 R23.1
RXD_FTDI: R2.1 U3.1
TXD_FTDI: R4.2 U3.17
U0RXD: J5.6 R4.1 U1.40 | length 14.9
  Top Layer w0.254: J5.6@53.43,1.5 54.548,2.618 57.319,2.618 57.751,3.05 58.242,3.459 58.315,3.481 59.784,3.481 59.787,3.481 61.442,3.517 61.523,3.521 62.308,3.833 63.825,5.35 63.825,6.983 63.345,7.463 63.345,7.578 63.196,7.727 63.098,7.727 63.025,7.8 U1.40
U0TXD: J5.7 R2.2 U1.39 | length 16.8
  Top Layer w0.254: J5.7@50.89,1.5 51.107,1.717 51.817,1.717 53.063,2.963 53.294,2.963 53.527,3.196 57.25,3.196 57.652,3.598 58.053,3.916 58.125,3.938 59.595,3.938 59.597,3.938 61.33,3.974 61.79,4.215 63.075,5.5 63.075,6.998 62.803,7.27 62.688,7.27 62.495,7.463 62.495,7.578 62.346,7.727 62.248,7.727 62.175,7.8 U1.39
VBUS_SENSE: R24.1 R25.1 U3.16 | length 11.9
  Top Layer w0.254: R24.1 34.761,20.625 35.839,21.598 35.934,21.692 37.316,21.692 37.66,21.349 38.127,21.235 38.34,21.022 38.367,20.778 U3.16 38.375,20.383 38.383,20.375 R25.1
pads on no net: J1.A8 J1.B8 J2.A8 J2.B8 J6.24 U3.2 U3.4 U3.5 U3.6 U3.7 U3.14
copper on no net: | length 0.4
  Bottom Layer w0.254: 47.125,7.75 47.525,7.75